# EAGLE board Step-to-Talk V2 Jig TOP (EAGLE 8.4.2)

Size 41.91 x 36.83 mm. Coordinates in mm from the lower left corner, seen from the top.
Outline: 41.91,34.29 41.91,2.54 arc-90 39.37,0 26.23,0 arc-90 23.69,2.54 23.69,3.03 arc-90 26.23,5.57 28.77,5.57 arc270 31.31,8.11 31.31,28.35 arc270 28.77,30.89 12.53,30.89 arc270 9.99,28.35 9.99,8.11 arc270 12.53,5.57 15.07,5.57 arc-90 17.61,3.03 17.61,2.54 arc-90 15.07,0 2.54,0 arc-90 0,2.54 0,34.29 arc-90 2.54,36.83 39.37,36.83 arc-90 41.91,34.29
Copper layers (1*16): Top 0.035559375mm / dielectric 1.6mm / Bottom 0.035559375mm
Design rules "oshpark-2layer-tented": minimum track width 6mil, minimum drill 10mil, track to track 6mil, track to pad 6mil, pad to pad 6mil, via to via 6mil, smd to smd 6mil, copper to edge 15mil, drill to drill 6mil, minimum pad ring 5mil, minimum via ring 5mil, stop-mask expansion 2.5mil, vias tented up to drill 20mil, thermal gap 10mil

## Footprints (pad centres in the part's own frame; a part is rotated, then mirrored left to right if it is on the bottom)
STAND-OFF-TIGHT = hole 3.048: 0,0

## Placement (x,y rotation side)
U$1  [STAND-OFF-TIGHT]  3.81,33.02 0 top
U$2  [STAND-OFF-TIGHT]  3.81,3.81 0 top
U$3  [STAND-OFF-TIGHT]  38.1,33.02 0 top
U$4  [STAND-OFF-TIGHT]  38.1,3.81 0 top

## Library data of the parts
U$1-U$4 = SparkFun-Hardware

## Text on the board
Dimension: ROUTE OUT